# Altium PCB programmer_adaptor.PcbDoc
Units mm, origin at the board's own origin, x right, y up, seen from the top; angles counter-clockwise.
Board outline 36 x 35 mm, 2 copper layers (Top Layer, Bottom Layer), stack 1.595 mm thick; 36 components, 26 nets, 127 pads, 75 vias.
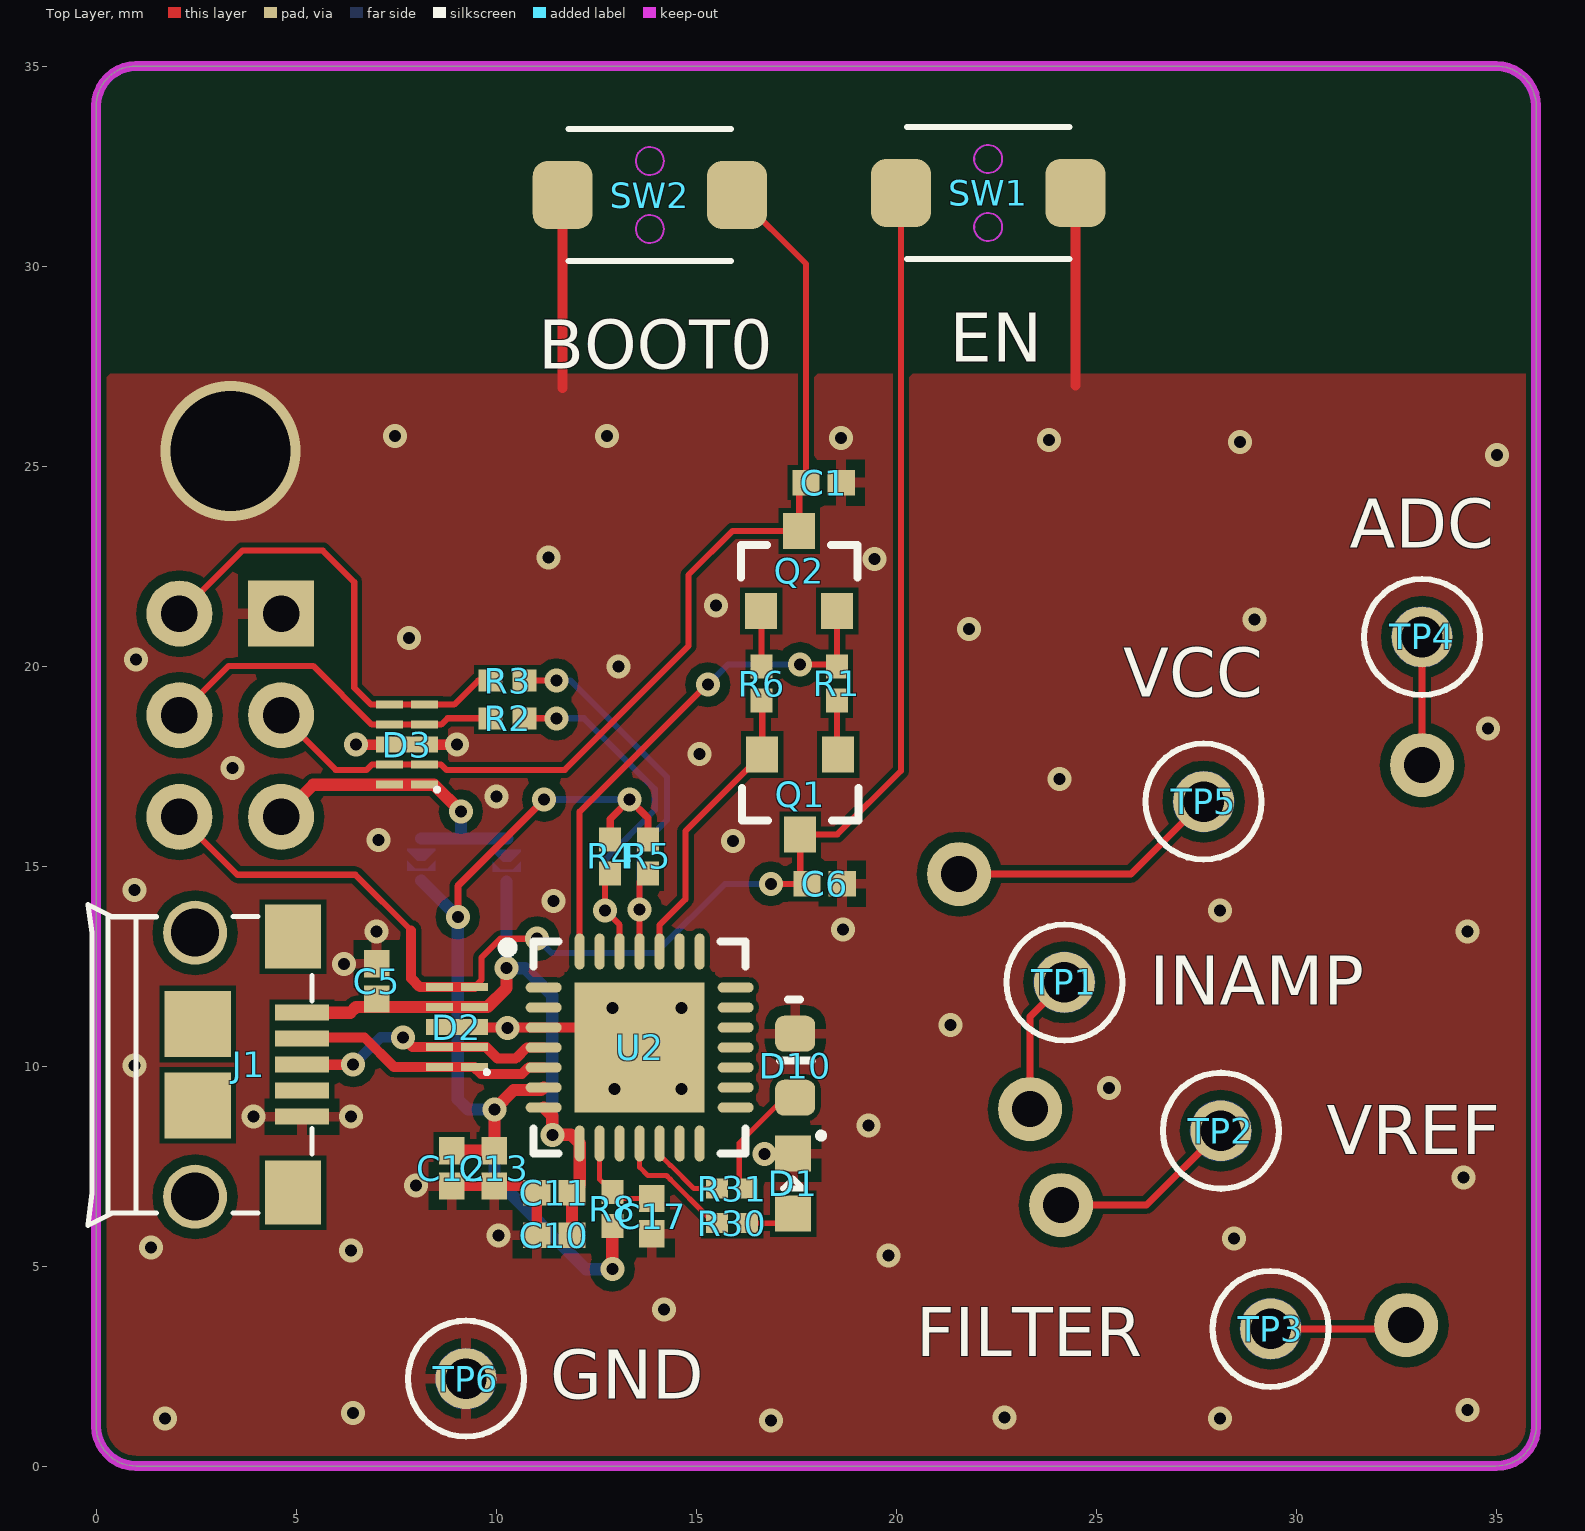
[diagram p0: Top Layer view]
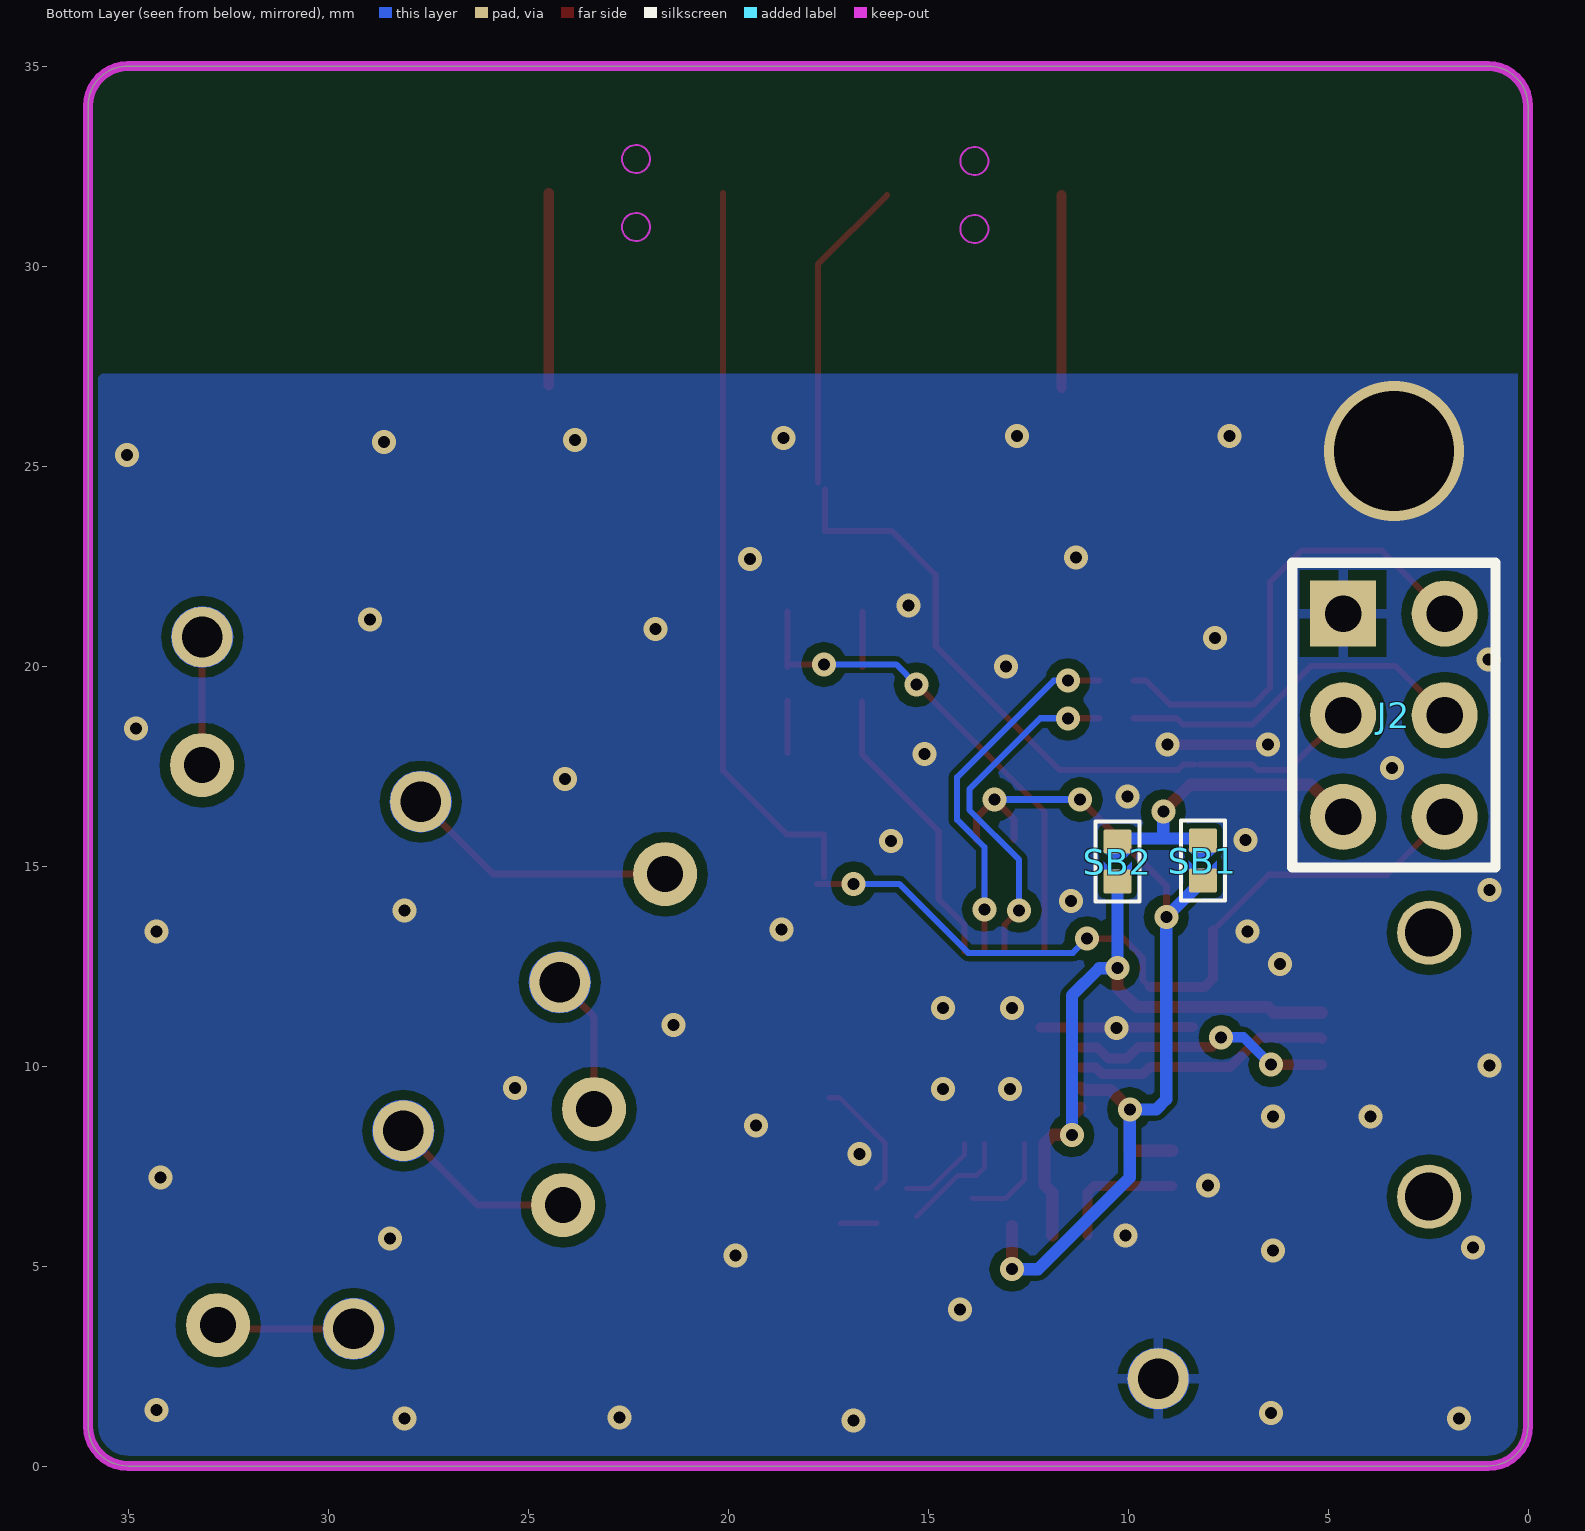
[diagram p1: Bottom Layer view, seen from below]

## Layer stack, top to bottom
Top Solder: solder mask 0.0254, Solder Resist, Dk 3.5
Top Layer: signal copper 0.0356
Dielectric 1: core 1.524, FR-4, Dk 4.6
Bottom Layer: signal copper 0.0356
Bottom Solder: solder mask 0.0254, Solder Resist, Dk 3.5

## Board outline
0,1 0,34 cw(c1,34) 1,35 35,35 cw(c35,34) 36,34 36,1 cw(c35,1) 35,0 1,0 cw(c1,1)

## Design rules (kind name [scope] priority, off if disabled: settings)
AssemblyTestPointUsage AssemblyTestPointUsage_1 [All] p2:
AssemblyTestpoint AssemblyTestpoint_1 [All] p2: testpointundercomponent=TRUE minsize=1.016 maxsize=2.54 preferedsize=1.524 minholesize=0 maxholesize=1.016 preferedholesize=0.813 testpointgrid=0.025 usegrid=TRUE gridtolerance=0 allowsidetop=TRUE allowsidebottom=TRUE
Clearance [All] p1: gap=0.254 ignorepadtopadclearanceinfootprint=FALSE except(0: Arc-Hole Track-Hole SMDPad-Hole THPad-Hole Via-Hole Fill-Hole Poly-Hole Region-Hole Text-Hole)
Clearance RF_Clearance [InNetClass('RF')] p2: gap=0.254 ignorepadtopadclearanceinfootprint=FALSE except(0: Arc-Hole Track-Hole SMDPad-Hole THPad-Hole Via-Hole Fill-Hole Poly-Hole Region-Hole Text-Hole; 0.127: Arc-Arc Arc-Track Arc-SMDPad Arc-Fill Arc-Region Track-Track Track-SMDPad Track-Fill Track-Region SMDPad-SMDPad SMDPad-THPad SMDPad-Fill SMDPad-Region Fill-Fill Fill-Region Region-Region; 0.33: Arc-THPad Track-THPad; 0.54: THPad-THPad; 0.88: Arc-Poly Track-Poly SMDPad-Poly THPad-Poly Via-Poly Fill-Poly Poly-Poly Poly-Region Poly-Text)
Clearance Clearance_1 [All] p3: gap=0.254 ignorepadtopadclearanceinfootprint=FALSE except(0: Arc-Hole Track-Hole SMDPad-Hole THPad-Hole Via-Hole Fill-Hole Poly-Hole Region-Hole Text-Hole; 0.127: Arc-Arc Arc-Track Arc-SMDPad Arc-Fill Arc-Poly Arc-Region Track-Track Track-SMDPad Track-Fill Track-Poly Track-Region SMDPad-SMDPad SMDPad-THPad SMDPad-Fill SMDPad-Poly SMDPad-Region Fill-Fill Fill-Poly Fill-Region Poly-Poly Poly-Region Region-Region; 0.33: Arc-THPad Track-THPad; 0.54: THPad-THPad)
ComponentClearance ComponentClearance_1 [All] p2 off: gap=0.254 collisioncheckmode=3 verticalgap=0.254 showdistances=FALSE
DiffPairsRouting DiffPairsRouting_1 [InDifferentialPair('No Differential Pair')] p2: maxlimit=0.254 minlimit=0.254 mostfreqgap=0.254 toplayer_minwidth=0.127 toplayer_maxwidth=0.381 toplayer_prefwidth=0.175 bottomlayer_minwidth=0.127 bottomlayer_maxwidth=0.381 bottomlayer_prefwidth=0.175 maxuncoupledlength=12.7
FabricationTestPointUsage FabricationTestPointUsage_1 [All] p2: valid=0 allowmultiple=FALSE
FabricationTestpoint FabricationTestpoint_1 [All] p2: side=3 testpointundercomponent=TRUE minsize=1.016 maxsize=2.54 preferedsize=1.524 minholesize=0 maxholesize=1.016 preferedholesize=0.813 testpointgrid=0.025 allowsidetop=TRUE allowsidebottom=TRUE usegrid=TRUE gridtolerance=0
FanoutControl Fanout_LCC [IsLCC] p1: bgadir=Out bgaviamode=Centered fanoutstyle=Auto fanoutdirection=Alternating viagrid=0.025 // Fanout_LCC (Default Rule)
FanoutControl Fanout_BGA [IsBGA] p2: bgadir=Out bgaviamode=Centered fanoutstyle=Auto fanoutdirection=Alternating viagrid=0.025 // Fanout_BGA (Default Rule)
FanoutControl Fanout_Default [All] p4: bgadir=Out bgaviamode=Centered fanoutstyle=Auto fanoutdirection=Alternating viagrid=0.025 // Fanout_Default (Default Rule)
FanoutControl Fanout_Small [(CompPinCount < 5)] p5: bgadir=Out bgaviamode=Centered fanoutstyle=Auto fanoutdirection=OutThenIn viagrid=0.025 // Fanout_Small (Default Rule)
FanoutControl Fanout_BGA_1 [IsBGA] p6: bgadir=Out bgaviamode=Centered fanoutstyle=Auto fanoutdirection=Alternating viagrid=0.025 // Fanout_BGA (Default Rule)
FanoutControl Fanout_LCC_1 [IsLCC] p7: bgadir=Out bgaviamode=Centered fanoutstyle=Auto fanoutdirection=Alternating viagrid=0.025 // Fanout_LCC (Default Rule)
FanoutControl Fanout_SOIC_1 [IsSOIC] p8: bgadir=Out bgaviamode=Centered fanoutstyle=Auto fanoutdirection=Alternating viagrid=0.025 // Fanout_SOIC (Default Rule)
FanoutControl Fanout_Small_1 [(CompPinCount < 5)] p9: bgadir=Out bgaviamode=Centered fanoutstyle=Auto fanoutdirection=OutThenIn viagrid=0.025 // Fanout_Small (Default Rule)
FanoutControl Fanout_Default_1 [All] p10: bgadir=Out bgaviamode=Centered fanoutstyle=Auto fanoutdirection=Alternating viagrid=0.025 // Fanout_Default (Default Rule)
Height Height_1 [All] p2: minheight=0 maxheight=25.4 prefheight=12.7
HoleSize HoleSize_1 [All] p2: absolutevalues=TRUE maxlimit=6.35 minlimit=0.02 maxpercent=80.000 minpercent=20.000
HoleToHoleClearance HoleToHoleClearance_1 [All] p2: gap=0.254 allowstackedmicrovias=TRUE
LayerPairs LayerPairs_1 [All] p2: enforce=TRUE
MinimumAnnularRing [All] p1: minimumring=0.13
MinimumSolderMaskSliver MinimumSolderMaskSliver_1 [All] p2: minsoldermaskwidth=0.2
NetAntennae NetAntennae_1 [All] p2: netantennaetolerance=0
PasteMaskExpansion PasteMaskExpansion_1 [All] p2: expansion=0
PlaneClearance PlaneClearance_1 [All] p2: clearance=0.508
PlaneConnect PlaneConnect_1 [All] p2: planeconnectstyle=Relief reliefexpansion=0.508 reliefentries=4 reliefconductorwidth=0.254 reliefairgap=0.254
PolygonConnect [All] p1: connectstyle=Relief reliefconductorwidth=0.254 reliefentries=4 polygonreliefangle="90 Angle" airgapwidth=0.254
PolygonConnect PolygonConnect_Via [IsVia] p2: connectstyle=Direct reliefconductorwidth=0.254 reliefentries=4 polygonreliefangle="90 Angle" airgapwidth=0.254
PolygonConnect PolygonConnect_1 [All] p3: connectstyle=Relief reliefconductorwidth=0.254 reliefentries=4 polygonreliefangle="90 Angle" airgapwidth=0.254
RoutingCorners RoutingCorners_1 [All] p2: cornerstyle=45-Degree minsetback=2.54 maxsetback=2.54
RoutingLayers RoutingLayers_1 [All] p2: top layer_v5=TRUE bottom layer_v5=TRUE
RoutingPriority RoutingPriority_1 [All] p2: routingpriority=0
RoutingTopology RoutingTopology_1 [All] p2: topology=Shortest
RoutingVias [All] p1: holewidth=0.711 width=1.27 viastyle="Through Hole" minholewidth=0.711 minwidth=1.27 maxholewidth=0.711 maxwidth=1.27
RoutingVias RoutingVias_1 [All] p2: holewidth=1 width=0.6 viastyle="Through Hole" minholewidth=0.2 minwidth=0.45 maxholewidth=6.3 maxwidth=7
ShortCircuit ShortCircuit_1 [All] p2: allowed=FALSE
SilkToBoardRegionClearance SilkToBoardRegionClearance_1 [All] p2:
SilkToSilkClearance SilkToSilkClearance_1 [All] p2: silktosilkclearance=0.15
SilkToSolderMaskClearance SilkToSolderMaskClearance_1 [IsPad] p2: minsilkscreentomaskgap=0.15 clearancetoexposedcopper=TRUE
SolderMaskExpansion [All] p1: expansion=0.102 istentingtop=FALSE
SolderMaskExpansion SolderMaskExpansion_1 [All] p2: expansion=0.102 istentingtop=FALSE
UnRoutedNet UnRoutedNet_1 [All] p2:
UnpouredPolygon UnpouredPolygon_1 [All] p2:
Width [All] p1: maxlimit=0.254 minlimit=0.254 preferedwidth=0.254
Width Width_1 [All] p2: maxlimit=2.54 minlimit=0.089 preferedwidth=0.127
26 further rules are at their usual default settings.

## Components (designator, comment, footprint, x,y, rotation, side; value= is the part's Value field where it differs from the comment)
C1 "100nF" CAPC1005X56X25NL10T15 18.186,24.587 r0 top
C5 "Samsung CL05A475MP5NRNC" PCB-ly623x0ckhe065kxsmmc-1 7.01,12.116 r270 top
C6 "100nF" CAPC1005X56X25NL10T15 18.212,14.554 r0 top
C10 "Samsung CL05A105KA5NQNC" PCB-515da9ytrm2wahx6tw11-1 11.455,5.766 r0 top
C11 "100nF" CAPC1005X56X25NL10T15 11.455,6.833 r180 top
C12 "Samsung CL05A475MP5NRNC" PCB-ly623x0ckhe065kxsmmc-1 8.89,7.442 r90 top
C13 "100nF" CAPC1005X56X25NL10T15 9.957,7.442 r270 top
C17 "100nF" CAPC1005X56X25NL10T15 13.894,6.248 r270 top
D1 "Green" PCB-qrh50x9m6cshxb6d9t7t-1 17.424,7.061 r270 top
D2 "Littelfuse SP3010-04UTG" CAF-50P250X100-10N 9.017,10.973 r180 top
D3 "Littelfuse SP3010-04UTG" CAF-50P250X100-10N 7.772,18.034 r180 top
D10 "RED" PCB-w5d6ij34fe7jw11ooj6d-1 17.475,10.008 r90 top
J1 "FCI-10118193-0001LF" PCB-no442bxfm6el1a6nc6pa-1 3.81,10.033 r270 top
J2 "Mill-Max 827-22-006-10-001101" PCB-1cajzzw71vgb0kstyzhz-1 4.623,21.311 r270 bottom
Q1 "NPN" PCB-tafg2djhou6mrz6nnzkw-1 17.602,16.789 r270 top
Q2 "NPN" PCB-tafg2djhou6mrz6nnzkw-1 17.577,22.377 r90 top
R1 "Yageo / Phycomp RC0402FR-1310KL" RESC1005X40X25NL05T10 18.517,19.558 r90 top
R2 "Yageo AC0402JR-070RL" RESC1005X37X25NL05T10 10.287,18.694 r0 top
R3 "Yageo AC0402JR-070RL" RESC1005X37X25NL05T10 10.287,19.634 r180 top
R4 "Yageo / Phycomp RC0402FR-1310KL" RESC1005X40X25NL05T10 12.852,15.24 r90 top
R5 "Yageo / Phycomp RC0402FR-1310KL" RESC1005X40X25NL05T10 13.792,15.24 r90 top
R6 "Yageo / Phycomp RC0402FR-1310KL" RESC1005X40X25NL05T10 16.637,19.558 r270 top
R8 "Vishay Dale CRCW04024K70FKEDHP" RESC1005X40X25NL05T10 12.903,6.426 r270 top
R30 "KOA Speer RK73H1ETTP1001F" RESC1005X40X25LL10T10 15.9,6.071 r0 top
R31 "KOA Speer RK73H1ETTP1001F" RESC1005X40X25LL10T10 15.9,6.934 r0 top
SB1 "Solder Bridge 0402" PCB-zgo6wgtf9tfvr4qcvek3-1 8.128,15.138 r90 bottom
SB2 "Solder Bridge 0402" PCB-zgo6wgtf9tfvr4qcvek3-1 10.262,15.113 r90 bottom
SW1 "TS-1185-C-A-A-A" PCB-qarcnbrnejma51b9hfzm-1 22.301,31.826 r180 top
SW2 "TS-1185-C-A-A-A" PCB-qarcnbrnejma51b9hfzm-1 13.843,31.775 r0 top
TP1 "Keystone Electronics 5002" TEST_LOOP 24.206,12.09 r0 top
TP2 "Keystone Electronics 5002" TEST_LOOP 28.118,8.382 r0 top
TP3 "Keystone Electronics 5002" TEST_LOOP 29.362,3.429 r0 top
TP4 "Keystone Electronics 5002" TEST_LOOP 33.147,20.726 r0 top
TP5 "Keystone Electronics 5002" TEST_LOOP 27.686,16.612 r0 top
TP6 "Keystone Electronics 5002" TEST_LOOP 9.246,2.184 r0 top
U2 "Silicon Labs CP2102-GMR" QFN50P500X500X100_HS-29N 13.589,10.465 r0 top

## Footprints (in the part's own frame and the unit in brackets; to place one, negate y for a bottom-side part, rotate by r counter-clockwise, add the part's x,y. Pads: shape width x height; smd on the part's side, far side on the other; paste and mask are expansions set on the pad)
CAF-50P250X100-10N [mm] "uDFN-10, Pitch 0.50mm,  Body 2.50x1.00mm,  IPC Medium Density"
  rect 0.675x0.2 smd: 1(-0.437,1) 1(0.437,1) 2(-0.437,0.5) 2(0.437,0.5) 4(-0.437,-0.5) 4(0.437,-0.5) 5(-0.437,-1) 5(0.437,-1)
  rect 1.55x0.4 smd: 3(0,0)
  silkscreen extent -0.8,1.08 -0.7,1.18, body extent -0.55,-1.3 0.55,1.3, height 0.55
CAPC1005X56X25NL10T15 [mm] "CAPC1005X56X25NL10T15"
  rect 0.68x0.64 smd: 1(-0.44,0) 2(0.44,0)
  body extent -0.55,-0.3 0.55,0.3, height 0.56
PCB-1cajzzw71vgb0kstyzhz-1 [mil]
  rect 65x65 hole 36: 1(0,0)
  round 65 hole 36: 2(0,100) 3(100,0) 4(100,100) 5(200,0) 6(200,100)
  silkscreen extent -50,-50 250,150, body extent -50,-50 250,150, height 302
PCB-515da9ytrm2wahx6tw11-1 [mm] "CAPC1005X56X25NL10T15"
  rect 0.68x0.64 smd: 1(-0.44,0) 2(0.44,0)
  body extent -0.55,-0.3 0.55,0.3, height 0.56
PCB-ly623x0ckhe065kxsmmc-1 [mm] "CAPC1005X56X25NL10T15"
  rect 0.68x0.64 smd: 1(-0.44,0) 2(0.44,0)
  body extent -0.55,-0.3 0.55,0.3, height 0.56
PCB-no442bxfm6el1a6nc6pa-1 [mm] "MICRO-USB5+6P-SMD-0.65-B"
  rect 0.4x1.35 smd mask+0.05: 1(-1.3,1.338) 2(-0.65,1.338) 3(0,1.338) 4(0.65,1.338) 5(1.3,1.338)
  round 1.6 hole 1.2: 6(-3.3,-1.337) 6(3.3,-1.337)
  rect 1.6x1.4 smd: 6(-3.2,1.113) 6(3.2,1.113)
  rect 1.651x1.651 smd: 6(-1.016,-1.27) 6(1.016,-1.27)
  silkscreen extent -4,-4.01 4.01,1.59, body extent -3.93,-4.07 3.93,1.59, height 2.84
PCB-qarcnbrnejma51b9hfzm-1 [mm]
  rrect50% 1.5x1.7 smd: 1(-2.18,0) 2(2.18,0)
  Keep-Out Layer circle w0.051: c0,-0.85 r0.35
  Keep-Out Layer circle w0.051: c0,0.85 r0.35
  Multi-Layer pour cut-out: 0,0.5 -0.134,0.527 -0.247,0.603 -0.323,0.716 -0.35,0.85 -0.35,0.85 -0.35,0.85 -0.323,0.984 -0.247,1.097 -0.134,1.173 0,1.2 0,1.2 0,1.2 0.134,1.173 0.247,1.097 0.323,0.984 0.35,0.85 0.35,0.85 0.323,0.716 0.247,0.603 0.134,0.527 0,0.5
  silkscreen extent -2.03,-1.65 2.03,1.65, body extent -2.5,-1.5 2.5,1.5, height 2
PCB-qrh50x9m6cshxb6d9t7t-1 [mm] "DSMD0603GRID25PAD90"
  rect 0.9x0.9 smd: 1(0.75,0) 2(-0.75,0)
  silkscreen extent -1.27,-0.25 0.13,0.78, body extent -0.87,-0.48 0.87,0.47, height 0.92
PCB-tafg2djhou6mrz6nnzkw-1 [mm] "SOT23, 3-Leads, Body 2.92x1.3mm, Pitch 0.95mm"
  rect 0.9x0.8 smd: 1(-1,0.95) 2(-1,-0.95) 3(1,0)
  silkscreen extent -0.17,-1.46 0.65,1.46, body extent -1.23,-1.48 1.27,1.52, height 1.11
PCB-w5d6ij34fe7jw11ooj6d-1 [mm]
  rrect50% 0.9x1 smd: 1(-0.8,0) 2(0.8,0)
  silkscreen extent 0.13,-0.42 1.65,0.38, body extent -0.83,-0.36 0.82,0.36, height 0.68
PCB-zgo6wgtf9tfvr4qcvek3-1 [mm] "Open"
  rrect15% 0.6x0.7 smd: 1(-0.5,0) 2(0.5,0)
  Top Layer region: -0.25,0.35 0,0.35 -0.2,0.15 -0.2,-0.15 0,-0.35 -0.25,-0.35
  Top Layer region: 0.3,0.35 0.25,0.35 0,0.1 0,-0.1 0.25,-0.35 0.3,-0.35
  silkscreen extent -1,-0.55 1,0.55
QFN50P500X500X100_HS-29N [mm] "QFN, 28-Leads, Body 5.00x5.00mm, Pitch 0.50mm, Thermal Pad 3.25x3.25mm, IPC Medium Density"
  oval 0.9x0.25 smd: 1(-2.4,1.5) 2(-2.4,1) 3(-2.4,0.5) 4(-2.4,0) 5(-2.4,-0.5) 6(-2.4,-1) 7(-2.4,-1.5) 15(2.4,-1.5) 16(2.4,-1) 17(2.4,-0.5) 18(2.4,0) 19(2.4,0.5) 20(2.4,1) 21(2.4,1.5)
  oval 0.25x0.9 smd: 8(-1.5,-2.4) 9(-1,-2.4) 10(-0.5,-2.4) 11(0,-2.4) 12(0.5,-2.4) 13(1,-2.4) 14(1.5,-2.4) 22(1.5,2.4) 23(1,2.4) 24(0.5,2.4) 25(0,2.4) 26(-0.5,2.4) 27(-1,2.4) 28(-1.5,2.4)
  rect 3.25x3.25 smd: 29(0,0)
  silkscreen extent -3.42,-2.65 2.65,2.65, body extent -2.5,-2.5 2.5,2.5, height 1
RESC1005X37X25NL05T10 [mm] "RESC1005X37X25NL05T10"
  rect 0.6x0.55 smd: 1(-0.425,0) 2(0.425,0)
  body extent -0.53,-0.27 0.53,0.28, height 0.37
RESC1005X40X25LL10T10 [mm] "RESC1005X40X25LL10T10"
  rect 0.55x0.5 smd: 1(-0.375,0) 2(0.375,0)
  body extent -0.55,-0.3 0.55,0.3, height 0.4
RESC1005X40X25NL05T10 [mm] "RESC1005X40X25NL05T10"
  rect 0.6x0.55 smd: 1(-0.425,0) 2(0.425,0)
  body extent -0.53,-0.27 0.53,0.28, height 0.4
TEST_LOOP [mil] "TEST_LOOP"
  round 60 hole 40: 1(0,0)
  Bottom Layer region: 30.48,0 29.44,7.89 26.4,15.24 21.55,21.55 15.24,26.4 7.89,29.44 0,30.48 -7.89,29.44 -15.24,26.4 -21.55,21.55 -26.4,15.24 -29.44,7.89 -30.48,0 -29.44,-7.89 -26.4,-15.24 -21.55,-21.55 -15.24,-26.4 -7.89,-29.44 0,-30.48 7.89,-29.44 15.24,-26.4 21.55,-21.55 26.4,-15.24 29.44,-7.89 30.48,0
  silkscreen extent -57,-57 57,57, body extent -49,-49 49,49, height 182

## Part data
C1 C6 C11 C13 C17: library part CMP-bf2276a55d9a60e5-19, "Ceramic capacitor SMD-0402 100nF /16V X7R# K +-10%, Samsung, RoHS"
C5 C12: library part CMP-45408d1ae5db9a87-3, "Cap Ceramic 4.7uF 10V X5R 20% SMD 0402 85°C Paper T/R"
C10: library part CMP-8f214705328650e6-4, "Cap Ceramic 1uF 25V X5R 10% SMD 0402 85°C Cardboard T/R"
D1: library part CMP-7093b92408b7af54-1, "LED SMD Top View Uni-Color Brilliant Green 518nm 0603 Pkg ø7T/R 3k\""
D2 D3: library part CMP-8bbd427616b0547a-5, "SP3010 Series 12.3 V 3 A 0.45 pF Quad Uni-Directional TVS Diode Array - UDFN-10"
D10: library part CMP-a33c6a36c6057cfb-1, "Red 0603 1.6 x 0.8 mm 160° Diffused 14 mcd 2 V PCB Chip Surface Mount LED"
J1: library part CMP-b7d77f99eeaa6810-13, "Conn Micro USB Type B RCP 5 POS 0.65mm Solder RA SMD 5 Terminal 1 Port T/R"
J2: library part CMP-e3db2be582e23c1c-3, "Conn Spring Loaded Connector HDR 6 POS 2.54mm Solder ST Thru-Hole Tube"
Q1 Q2: library part CMP-1301de72f0beccc6-3, "Trans Gp Bjt NPN 25V 1.5A 300MW 3-PIN SOT-23 T/r"
R1 R4 R5 R6: library part CMP-3661304-2, "Thick Film Resistors - SMD 10K OHM 1%"
R2 R3: library part CMP-1900348-2, "RES SMD 0.0 OHM JUMPER 1/16W"
R8: library part CMP-1859046-2, "Thick Film Resistors - SMD 1/8watt 4.7Kohms 1% 100ppm High Power"
R30 R31: library part CMP-2823544-2, "Res Thick Film 0402 1K Ohm 1% 0.063W(1/16W) ±100ppm/C Molded SMD Automotive Punched Paper T/R"
SB1 SB2: library part CMP-p5m5ndkvhoystooqawk9-2, "Solder Bridge Jumper, can be fitted with 0402 0R resistor for automated production"
SW1 SW2: library part CMP-hgui3ccx9uakpoe7vbsx-5, "SPST 50mA @ 12VDC Vertical Round Button 260gf SMD Tactile Switches RoHS"
TP1 TP2 TP3 TP4 TP5 TP6: library part CMP-954155-2, "KEYSTONE   5002   Series:-"
U2: library part CMP-1313603-13, "Microcontroller Solutions - Interface Products USB-TO-UART BRIDGE"

## Free pads (board coordinates)
  round 1.6 hole 0.9: ""(21.575,14.8) ""(23.35,8.925) ""(24.125,6.525) ""(32.75,3.525) ""(33.15,17.525)

## Via types
v1: diameter 0.6, hole 0.3, Top Layer to Bottom Layer, tented both sides, 74 vias
v2: diameter 3.5, hole 3, Top Layer to Bottom Layer, 1 vias

## Nets (pads, with @x,y where several pads share a name; then routed paths per layer and width w, separated by ;. In a path a pad name is that pad's centre, name@x,y a point inside that pad or via, vN(x,y) a via of type N, cw(c..) or ccw(c..) an arc to the next point about the centre after c; other vN are vias at no path point)
ADC: pad.@33.15,17.525 TP4.1 | length 3.2
  Top Layer w0.178: pad.@33.15,17.525 TP4.1@33.15,20.723
D_N: D2.1 J1.2 U2.5 | length 6.5
  Top Layer w0.254: J1.2 5.179,10.714 6.708,10.714 7.449,9.973 8.58,9.973 9.454,9.973 9.623,9.804 10.646,9.804 10.806,9.965 U2.5
D_P: D2.2 J1.3 U2.4 | length 6.7
  Top Layer w0.254: J1.3 v1(6.426,10.033) ; v1(7.671,10.719) 7.917,10.473 8.58,10.473 9.454,10.473 9.751,10.473 10.039,10.185 10.488,10.185 10.767,10.465 U2.4
  Bottom Layer w0.254: v1(6.426,10.033) 7.112,10.719 v1(7.671,10.719)
DBG_PWR: D3.1 J2.5 SB1.2 SB2.2 | length 7.9
  Top Layer w0.305: J2.5 5.426,17.034 8.446,17.034 v1(9.119,16.361)
  Bottom Layer w0.305: SB1.2@8.128,15.689 SB2.2@10.287,15.689 ; 9.119,15.74 v1(9.119,16.361)
DTR: Q2.2 R1.2 U2.28 | length 12.7
  Top Layer w0.152: U2.28 12.089,16.356 v1@15.265,19.533 ; v1(17.602,20.041) R1.2@18.459,20.041 ; R1.2 Q2.2@18.517,21.367
  Bottom Layer w0.152: v1(15.291,19.533) 15.799,20.041 v1(17.602,20.041)
ESP32_BOOT0: C1.1 D3.2 J2.3 Q2.3 SW2.2 | length 26
  Top Layer w0.152: J2.3 5.99,17.404 6.763,17.404 6.894,17.534 7.335,17.534 D3.2@8.21,17.534 ; D3.2@8.337,17.534 8.626,17.534 8.756,17.404 11.714,17.404 14.808,20.498 14.808,22.276 15.91,23.377 Q2.3 C1.1@17.577,24.418 ; SW2.2 17.746,30.052 C1.1
ESP32_EN: C6.1 D2.5 J2.6 Q1.3 SW1.2 | length 38.5
  Top Layer w0.152: J2.6 3.531,14.783 6.479,14.783 7.874,13.388 ; D2.5@9.454,11.973 9.631,12.15 9.631,12.707 10.107,13.183 v1(11.024,13.183) ; v1(16.866,14.554) C6.1 ; C6.1@17.602,14.724 Q1.3 18.533,15.789 20.121,17.378 SW1.2
  Top Layer w0.254: 7.874,13.388 7.874,12.192 8.093,11.973 8.58,11.973 D2.5@9.454,11.973
  Bottom Layer w0.152: v1(11.024,13.183) 11.379,12.827 13.995,12.827 15.723,14.554 v1(16.866,14.554)
ESP32_RX: D3.4 J2.4 R2.1 | length 9
  Top Layer w0.152: J2.4 3.314,20.002 5.425,20.002 6.894,18.534 7.335,18.534 8.21,18.534 8.626,18.534 8.786,18.694 R2.1
ESP32_TX: D3.5 J2.2 R3.2 | length 11.8
  Top Layer w0.152: J2.2 3.658,22.885 5.664,22.885 6.452,22.098 6.452,19.456 6.874,19.034 7.335,19.034 8.21,19.034 8.95,19.034 9.55,19.634 R3.2
FILTER: pad.@32.75,3.525 TP3.1 | length 3.3
  Top Layer w0.178: TP3.1 pad.@32.654,3.429
GND: C1.2 C5.1 C6.2 C10.1 C11.2 C12.1 C13.2 C17.2 D1.2 D2.3 D3.3 D10.2 J1.5 J2.1 SW1.1 SW2.1 TP6.1 U2.3 U2.29 | length 19.2
  Top Layer w0.254: v1(6.502,18.034) D3.3 v1(9.017,18.034) ; D2.3@8.38,10.973 D2.3 ; C12.1 C13.2 10.846,7.002 C11.2 C10.1 ; D2.3@9.025,10.965 U2.3 U2.29@12.192,10.965 ; 11.663,26.954 SW2.1 ; 24.481,27.021 SW1.1
  other v1: 16.866,1.143 1.727,1.194 28.092,1.194 22.708,1.219 6.426,1.321 34.29,1.397 14.199,3.912 19.812,5.258 6.375,5.385 1.372,5.461 28.448,5.69 10.058,5.766 8.001,7.01 34.188,7.214 16.713,7.798 19.304,8.509 3.937,8.738 6.375,8.738 12.954,9.423 14.63,9.423 25.324,9.449 0.965,10.008 10.287,10.947 21.361,11.024 12.903,11.455 14.63,11.455 6.198,12.548 7.01,13.36 34.29,13.36 18.669,13.411 28.092,13.894 11.43,14.122 0.965,14.402 15.926,15.621 7.061,15.646 10.008,16.739 24.079,17.17 3.404,17.45 15.088,17.805 34.798,18.44 13.056,19.99 0.991,20.168 7.823,20.701 21.819,20.93 28.956,21.158 15.494,21.514 19.456,22.682 11.303,22.708 35.027,25.273 28.6,25.603 23.825,25.654 18.618,25.705 7.468,25.756 12.776,25.756
  other v2: 3.353,25.375
INAMP: pad.@23.35,8.925 TP1.1 | length 3.5
  Top Layer w0.178: pad.@23.35,8.925 23.35,11.234 TP1.1
NetC17_1: C17.1 R8.1 U2.9 | length 2.4
  Top Layer w0.127: U2.9 12.589,7.165 R8.1 13.066,6.688 C17.1
NetD1_1: D1.1 R30.2 | length 0.9
  Top Layer w0.127: R30.2@16.281,6.071 D1.1@17.184,6.071
NetD10_1: D10.1 R31.2 | length 3.1
  Top Layer w0.127: R31.2@16.281,6.934 16.078,7.137 16.078,8.077 17.209,9.208 D10.1
NetQ1_1: Q1.1 R1.1 | length 1.3
  Top Layer w0.152: Q1.1@18.517,17.825 R1.1
NetQ2_1: Q2.1 R6.1 | length 1.4
  Top Layer w0.152: R6.1 Q2.1@16.637,21.367
NetR30_1: R30.1 U2.11 | length 2.8
  Top Layer w0.127: U2.11 13.589,7.468 13.792,7.264 14.259,7.264 14.353,7.17 R30.1@15.283,6.241
NetR31_1: R31.1 U2.12 | length 2.1
  Top Layer w0.127: U2.12 14.089,7.78 14.351,7.518 14.364,7.518 14.948,6.934 R31.1@15.531,6.934
RTS: Q1.2 R6.2 U2.24 | length 7.3
  Top Layer w0.152: U2.24 14.089,13.528 14.732,14.171 14.732,15.869 Q1.2 R6.2@16.652,19.118
VBUS: C5.2 C10.2 C11.1 D2.4 J1.1 SB2.1 U2.7 U2.8 | length 16.9
  Top Layer w0.305: J1.1 6.355,11.333 6.494,11.473 8.58,11.473 9.454,11.473 9.787,11.473 10.262,11.947 v1(10.262,12.446) ; U2.7 11.405,8.749 v1(11.405,8.28) 11.873,8.28 U2.8 12.089,7.026 C11.1 C10.2
  Bottom Layer w0.305: SB2.1 v1(10.262,12.446) 10.719,12.446 11.405,11.76 v1(11.405,8.28)
VBUS_3V3: C12.2 C13.1 R4.2 R5.2 R8.2 SB1.1 U2.6 | length 25.5
  Top Layer w0.178: v1(9.042,13.724) 9.042,14.503 v1(11.201,16.662) ; R4.2 12.852,16.18 v1(13.335,16.662) 13.792,16.205 R5.2
  Top Layer w0.305: C12.2 C13.1 v1(9.957,8.915) 10.439,9.398 11.122,9.398 U2.6 ; v1(12.903,4.922) R8.2
  Bottom Layer w0.178: v1(11.201,16.662) v1(13.335,16.662)
  Bottom Layer w0.305: SB1.1 v1(9.042,13.724) 9.042,9.169 9.296,8.915 v1(9.957,8.915) 9.957,7.214 12.249,4.922 v1(12.903,4.922)
VCC: pad.@21.575,14.8 TP5.1 | length 6.9
  Top Layer w0.178: pad.@21.575,14.8 25.874,14.8 TP5.1
VCOM_RX: R3.1 R5.1 U2.25 | length 9.9
  Top Layer w0.152: R3.1 v1(11.506,19.634) ; U2.25 v1(13.589,13.919) R5.1@13.589,14.612
  Bottom Layer w0.152: v1(11.506,19.634) 11.862,19.634 14.275,17.221 14.275,16.154 13.589,15.469 v1(13.589,13.919)
VCOM_TX: R2.2 R4.1 U2.26 | length 9.5
  Top Layer w0.152: R2.2 v1(11.506,18.694) ; R4.1@12.725,14.688 v1(12.725,13.894) 13.089,13.53 U2.26
  Bottom Layer w0.152: v1(11.506,18.694) 12.194,18.694 13.965,16.923 13.965,16.401 12.725,15.162 v1(12.725,13.894)
VREF: pad.@24.125,6.525 TP2.1 | length 4.8
  Top Layer w0.178: pad.@24.125,6.525 26.261,6.525 TP2.1
pads on no net: J1.4 J1.6 U2.1 U2.2 U2.10 U2.13 U2.14 U2.15 U2.16 U2.17 U2.18 U2.19 U2.20 U2.21 U2.22 U2.23 U2.27

## Polygon pours and split planes (outlines as drawn)
GND on Top Layer "Top_iso_ground" (solid, remove dead copper, pour order 6): 36,0 36,27.305 -0.022,27.305 0.035,0
GND on Bottom Layer "Bottom_VBUS_GND" (solid, remove dead copper, pour order 5): 36,0 36,27.305 0,27.305 0,0

## Keep-outs
Keep-Out Layer:
  the board outline again, w0.254

## Silkscreen, mask and mechanical layers (free items; w line width, h text height)
Top Overlay:
  text "EN" at 21.336,27.61 h1.22
  text "BOOT0" at 11.049,27.432 h1.22
  text "ADC" at 31.344,22.962 h1.22
  text "VCC" at 25.679,19.228 h1.22
  text "INAMP" at 26.34,11.532 h1.22
  text "VREF" at 30.759,7.798 h1.22
  text "FILTER" at 20.498,2.743 h1.22
  text "GND" at 11.354,1.676 h1.22
Outline:
  the board outline again, w0.254